# EAGLE board USB-C-Breakout-Panel (EAGLE 9.2.1), part 1 of 5
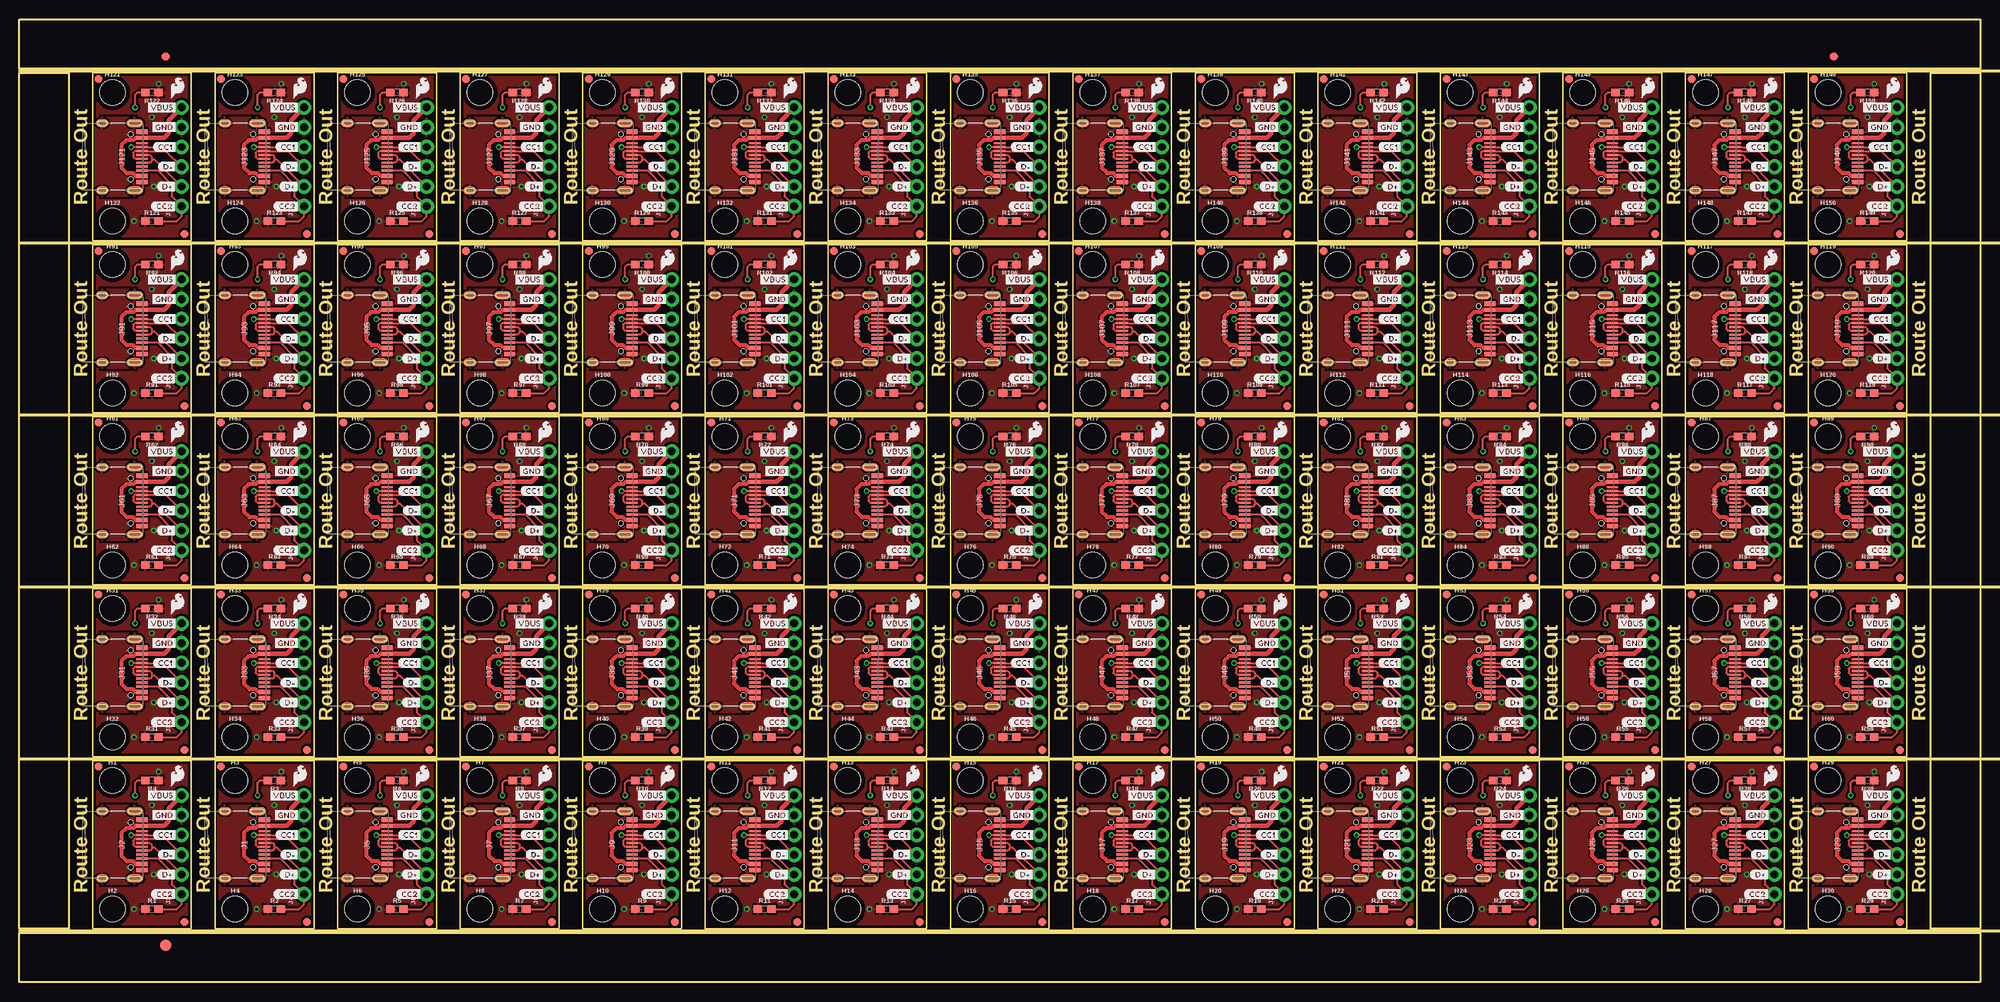
[diagram p0: board, top side]
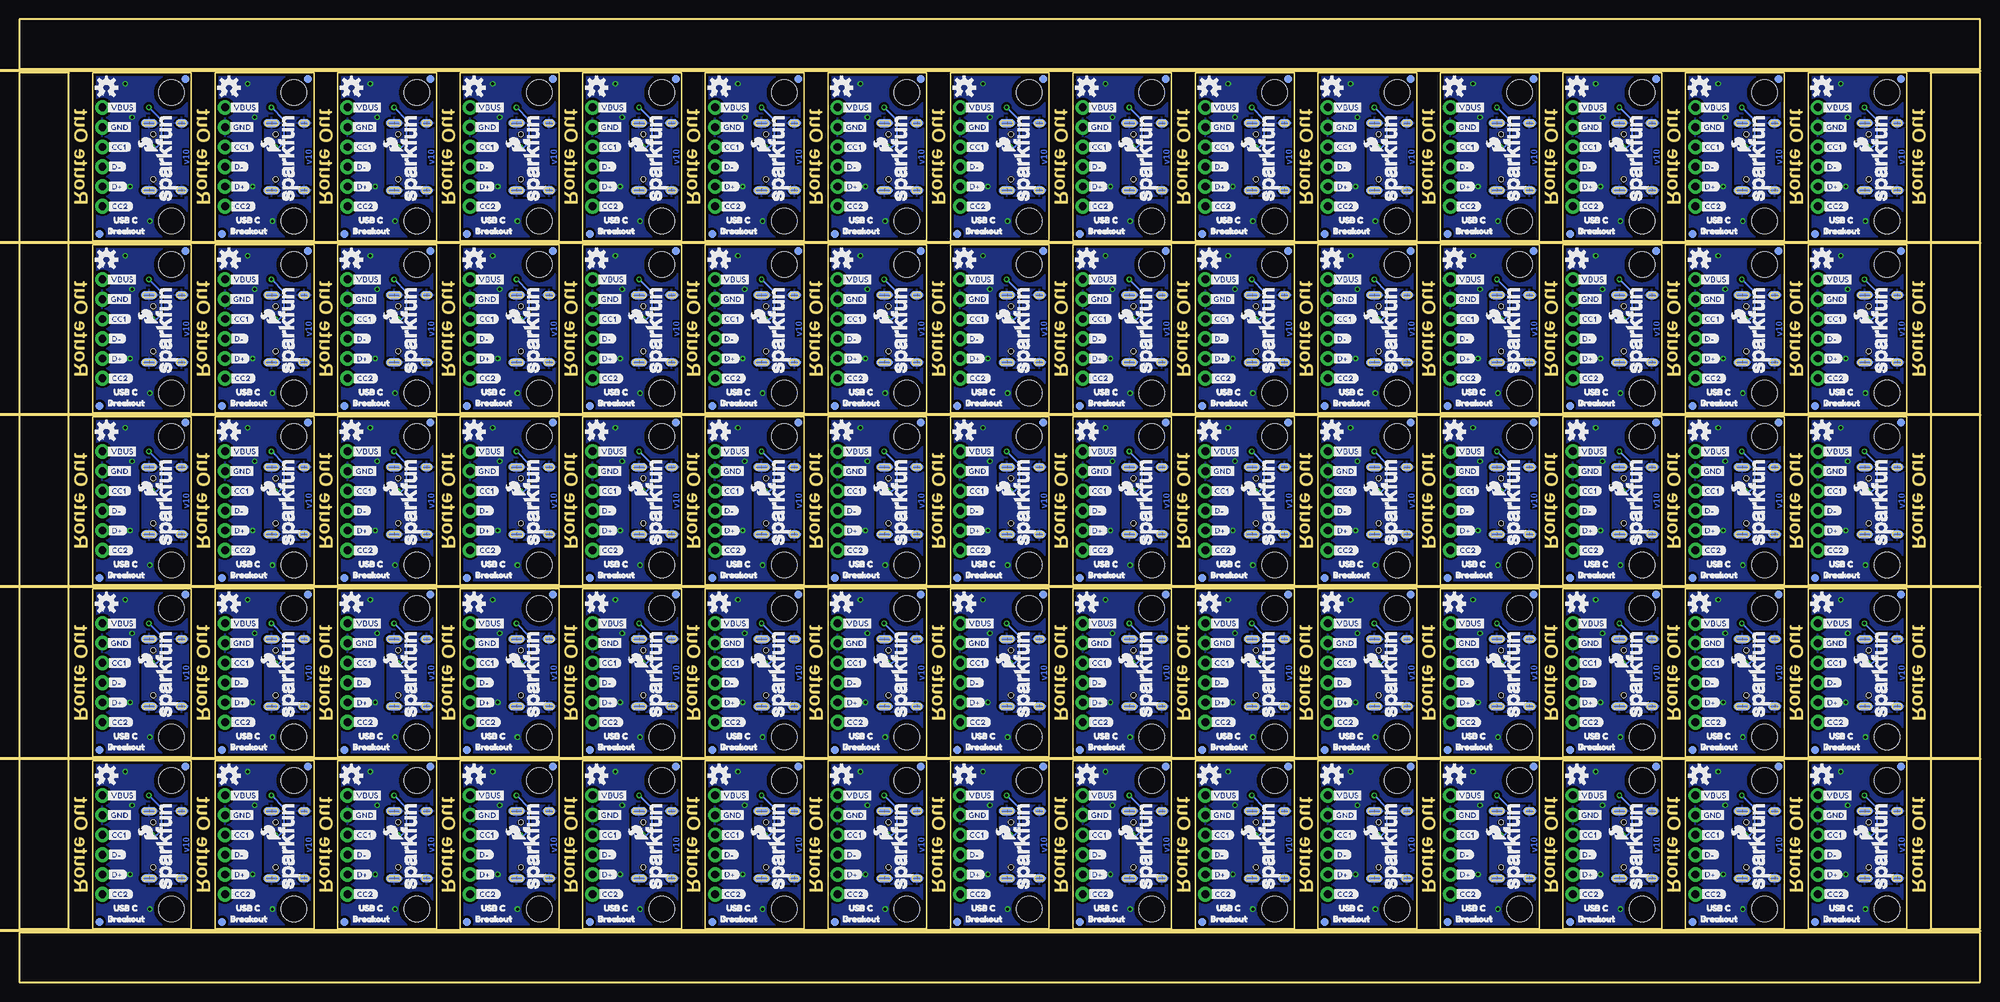
[diagram p1: board, bottom side, seen from below]

Size 251.97 x 123.7 mm. Coordinates in mm from the lower left corner, seen from the top.
Outline: 316 segments
Copper layers (1*16): Top 0.035mm / dielectric 1.5mm / Bottom 0.035mm
Design rules "SparkFun-2-layer-PCBWay-LIMIT": minimum track width 6mil, minimum drill 0.3mm, track to track 6mil, track to pad 6mil, pad to pad 6mil, via to via 6mil, smd to smd 6mil, copper to edge 6mil, drill to drill 6mil, minimum pad ring 6mil, minimum via ring 6mil, stop-mask expansion 4mil, vias tented up to drill 25mil, thermal gap 10mil
Net classes: 1 power: width 0.178 mm
Milling: 6 lines

## Footprints (pad centres in the part's own frame; a part is rotated, then mirrored left to right if it is on the bottom)
FIDUCIAL-1X2 = smd 1 x 1: 1 0,0
FIDUCIAL-1.5X3 = smd 1.5 x 1.5: 1 0,0
STAND-OFF = hole 3.302: 0,0
USB-C-16P = smd 0.3 x 1.45: A5 -1.25,0; A6 -0.25,0; A7 0.25,0; A8 1.25,0; B5 1.75,0; B6 0.75,0; B7 -0.75,0; B8 -1.75,0 | smd 0.6 x 1.45: GND -3.225,0; GND2 3.225,0 | smd 1 x 2.1: SHLD1 -4.32,-0.915; SHLD2 4.32,-0.915 | smd 1 x 2.1 bottom: SHLD3 -4.32,-0.915; SHLD4 4.32,-0.915 | smd 1 x 1.6: SHLD5 -4.32,-5.095; SHLD8 4.32,-5.095 | smd 1 x 1.6 bottom: SHLD6 -4.32,-5.095; SHLD7 4.32,-5.095 | smd 0.55 x 1.45: VBUS1 -2.45,0; VBUS2 2.45,0 | hole 0.65: -2.89,-1.445; 2.89,-1.445
1X06_NO_SILK = drill 1.016 pad 1.88: 1 0,0; 2 2.54,0; 3 5.08,0; 4 7.62,0; 5 10.16,0; 6 12.7,0
0603 = smd 1.1 x 1: 1 -0.85,0; 2 0.85,0

## Placement (x,y rotation side)
E$1  [FIDUCIAL-1X2]  18.8,118.94 0 top
E$2  [FIDUCIAL-1X2]  233.17,118.94 0 top
E$3  [FIDUCIAL-1.5X3]  18.8,4.76 0 top
H1  STAND-OFF  [STAND-OFF]  11.94,25.91 0 top
H2  STAND-OFF  [STAND-OFF]  11.94,9.4 0 top
H3  STAND-OFF  [STAND-OFF]  27.69,25.91 0 top
H4  STAND-OFF  [STAND-OFF]  27.69,9.4 0 top
H5  STAND-OFF  [STAND-OFF]  43.43,25.91 0 top
H6  STAND-OFF  [STAND-OFF]  43.43,9.4 0 top
H7  STAND-OFF  [STAND-OFF]  59.18,25.91 0 top
H8  STAND-OFF  [STAND-OFF]  59.18,9.4 0 top
H9  STAND-OFF  [STAND-OFF]  74.93,25.91 0 top
H10  STAND-OFF  [STAND-OFF]  74.93,9.4 0 top
H11  STAND-OFF  [STAND-OFF]  90.68,25.91 0 top
H12  STAND-OFF  [STAND-OFF]  90.68,9.4 0 top
H13  STAND-OFF  [STAND-OFF]  106.43,25.91 0 top
H14  STAND-OFF  [STAND-OFF]  106.43,9.4 0 top
H15  STAND-OFF  [STAND-OFF]  122.17,25.91 0 top
H16  STAND-OFF  [STAND-OFF]  122.17,9.4 0 top
H17  STAND-OFF  [STAND-OFF]  137.92,25.91 0 top
H18  STAND-OFF  [STAND-OFF]  137.92,9.4 0 top
H19  STAND-OFF  [STAND-OFF]  153.67,25.91 0 top
H20  STAND-OFF  [STAND-OFF]  153.67,9.4 0 top
H21  STAND-OFF  [STAND-OFF]  169.42,25.91 0 top
H22  STAND-OFF  [STAND-OFF]  169.42,9.4 0 top
H23  STAND-OFF  [STAND-OFF]  185.17,25.91 0 top
H24  STAND-OFF  [STAND-OFF]  185.17,9.4 0 top
H25  STAND-OFF  [STAND-OFF]  200.91,25.91 0 top
H26  STAND-OFF  [STAND-OFF]  200.91,9.4 0 top
H27  STAND-OFF  [STAND-OFF]  216.66,25.91 0 top
H28  STAND-OFF  [STAND-OFF]  216.66,9.4 0 top
H29  STAND-OFF  [STAND-OFF]  232.41,25.91 0 top
H30  STAND-OFF  [STAND-OFF]  232.41,9.4 0 top
H31  STAND-OFF  [STAND-OFF]  11.94,48.01 0 top
H32  STAND-OFF  [STAND-OFF]  11.94,31.5 0 top
H33  STAND-OFF  [STAND-OFF]  27.69,48.01 0 top
H34  STAND-OFF  [STAND-OFF]  27.69,31.5 0 top
H35  STAND-OFF  [STAND-OFF]  43.43,48.01 0 top
H36  STAND-OFF  [STAND-OFF]  43.43,31.5 0 top
H37  STAND-OFF  [STAND-OFF]  59.18,48.01 0 top
H38  STAND-OFF  [STAND-OFF]  59.18,31.5 0 top
H39  STAND-OFF  [STAND-OFF]  74.93,48.01 0 top
H40  STAND-OFF  [STAND-OFF]  74.93,31.5 0 top
H41  STAND-OFF  [STAND-OFF]  90.68,48.01 0 top
H42  STAND-OFF  [STAND-OFF]  90.68,31.5 0 top
H43  STAND-OFF  [STAND-OFF]  106.43,48.01 0 top
H44  STAND-OFF  [STAND-OFF]  106.43,31.5 0 top
H45  STAND-OFF  [STAND-OFF]  122.17,48.01 0 top
H46  STAND-OFF  [STAND-OFF]  122.17,31.5 0 top
H47  STAND-OFF  [STAND-OFF]  137.92,48.01 0 top
H48  STAND-OFF  [STAND-OFF]  137.92,31.5 0 top
H49  STAND-OFF  [STAND-OFF]  153.67,48.01 0 top
H50  STAND-OFF  [STAND-OFF]  153.67,31.5 0 top
H51  STAND-OFF  [STAND-OFF]  169.42,48.01 0 top
H52  STAND-OFF  [STAND-OFF]  169.42,31.5 0 top
H53  STAND-OFF  [STAND-OFF]  185.17,48.01 0 top
H54  STAND-OFF  [STAND-OFF]  185.17,31.5 0 top
H55  STAND-OFF  [STAND-OFF]  200.91,48.01 0 top
H56  STAND-OFF  [STAND-OFF]  200.91,31.5 0 top
H57  STAND-OFF  [STAND-OFF]  216.66,48.01 0 top
H58  STAND-OFF  [STAND-OFF]  216.66,31.5 0 top
H59  STAND-OFF  [STAND-OFF]  232.41,48.01 0 top
H60  STAND-OFF  [STAND-OFF]  232.41,31.5 0 top
H61  STAND-OFF  [STAND-OFF]  11.94,70.1 0 top
H62  STAND-OFF  [STAND-OFF]  11.94,53.59 0 top
H63  STAND-OFF  [STAND-OFF]  27.69,70.1 0 top
H64  STAND-OFF  [STAND-OFF]  27.69,53.59 0 top
H65  STAND-OFF  [STAND-OFF]  43.43,70.1 0 top
H66  STAND-OFF  [STAND-OFF]  43.43,53.59 0 top
H67  STAND-OFF  [STAND-OFF]  59.18,70.1 0 top
H68  STAND-OFF  [STAND-OFF]  59.18,53.59 0 top
H69  STAND-OFF  [STAND-OFF]  74.93,70.1 0 top
H70  STAND-OFF  [STAND-OFF]  74.93,53.59 0 top
H71  STAND-OFF  [STAND-OFF]  90.68,70.1 0 top
H72  STAND-OFF  [STAND-OFF]  90.68,53.59 0 top
H73  STAND-OFF  [STAND-OFF]  106.43,70.1 0 top
H74  STAND-OFF  [STAND-OFF]  106.43,53.59 0 top
H75  STAND-OFF  [STAND-OFF]  122.17,70.1 0 top
H76  STAND-OFF  [STAND-OFF]  122.17,53.59 0 top
H77  STAND-OFF  [STAND-OFF]  137.92,70.1 0 top
H78  STAND-OFF  [STAND-OFF]  137.92,53.59 0 top
H79  STAND-OFF  [STAND-OFF]  153.67,70.1 0 top
H80  STAND-OFF  [STAND-OFF]  153.67,53.59 0 top
H81  STAND-OFF  [STAND-OFF]  169.42,70.1 0 top
H82  STAND-OFF  [STAND-OFF]  169.42,53.59 0 top
H83  STAND-OFF  [STAND-OFF]  185.17,70.1 0 top
H84  STAND-OFF  [STAND-OFF]  185.17,53.59 0 top
H85  STAND-OFF  [STAND-OFF]  200.91,70.1 0 top
H86  STAND-OFF  [STAND-OFF]  200.91,53.59 0 top
H87  STAND-OFF  [STAND-OFF]  216.66,70.1 0 top
H88  STAND-OFF  [STAND-OFF]  216.66,53.59 0 top
H89  STAND-OFF  [STAND-OFF]  232.41,70.1 0 top
H90  STAND-OFF  [STAND-OFF]  232.41,53.59 0 top
H91  STAND-OFF  [STAND-OFF]  11.94,92.2 0 top
H92  STAND-OFF  [STAND-OFF]  11.94,75.69 0 top
H93  STAND-OFF  [STAND-OFF]  27.69,92.2 0 top
H94  STAND-OFF  [STAND-OFF]  27.69,75.69 0 top
H95  STAND-OFF  [STAND-OFF]  43.43,92.2 0 top
H96  STAND-OFF  [STAND-OFF]  43.43,75.69 0 top
H97  STAND-OFF  [STAND-OFF]  59.18,92.2 0 top
H98  STAND-OFF  [STAND-OFF]  59.18,75.69 0 top
H99  STAND-OFF  [STAND-OFF]  74.93,92.2 0 top
H100  STAND-OFF  [STAND-OFF]  74.93,75.69 0 top
H101  STAND-OFF  [STAND-OFF]  90.68,92.2 0 top
H102  STAND-OFF  [STAND-OFF]  90.68,75.69 0 top
H103  STAND-OFF  [STAND-OFF]  106.43,92.2 0 top
H104  STAND-OFF  [STAND-OFF]  106.43,75.69 0 top
H105  STAND-OFF  [STAND-OFF]  122.17,92.2 0 top
H106  STAND-OFF  [STAND-OFF]  122.17,75.69 0 top
H107  STAND-OFF  [STAND-OFF]  137.92,92.2 0 top
H108  STAND-OFF  [STAND-OFF]  137.92,75.69 0 top
H109  STAND-OFF  [STAND-OFF]  153.67,92.2 0 top
H110  STAND-OFF  [STAND-OFF]  153.67,75.69 0 top
H111  STAND-OFF  [STAND-OFF]  169.42,92.2 0 top
H112  STAND-OFF  [STAND-OFF]  169.42,75.69 0 top
H113  STAND-OFF  [STAND-OFF]  185.17,92.2 0 top
H114  STAND-OFF  [STAND-OFF]  185.17,75.69 0 top
H115  STAND-OFF  [STAND-OFF]  200.91,92.2 0 top
H116  STAND-OFF  [STAND-OFF]  200.91,75.69 0 top
H117  STAND-OFF  [STAND-OFF]  216.66,92.2 0 top
H118  STAND-OFF  [STAND-OFF]  216.66,75.69 0 top
H119  STAND-OFF  [STAND-OFF]  232.41,92.2 0 top
H120  STAND-OFF  [STAND-OFF]  232.41,75.69 0 top
H121  STAND-OFF  [STAND-OFF]  11.94,114.3 0 top
H122  STAND-OFF  [STAND-OFF]  11.94,97.79 0 top
H123  STAND-OFF  [STAND-OFF]  27.69,114.3 0 top
H124  STAND-OFF  [STAND-OFF]  27.69,97.79 0 top
H125  STAND-OFF  [STAND-OFF]  43.43,114.3 0 top
H126  STAND-OFF  [STAND-OFF]  43.43,97.79 0 top
H127  STAND-OFF  [STAND-OFF]  59.18,114.3 0 top
H128  STAND-OFF  [STAND-OFF]  59.18,97.79 0 top
H129  STAND-OFF  [STAND-OFF]  74.93,114.3 0 top
H130  STAND-OFF  [STAND-OFF]  74.93,97.79 0 top
H131  STAND-OFF  [STAND-OFF]  90.68,114.3 0 top
H132  STAND-OFF  [STAND-OFF]  90.68,97.79 0 top
H133  STAND-OFF  [STAND-OFF]  106.43,114.3 0 top
H134  STAND-OFF  [STAND-OFF]  106.43,97.79 0 top
H135  STAND-OFF  [STAND-OFF]  122.17,114.3 0 top
H136  STAND-OFF  [STAND-OFF]  122.17,97.79 0 top
H137  STAND-OFF  [STAND-OFF]  137.92,114.3 0 top
H138  STAND-OFF  [STAND-OFF]  137.92,97.79 0 top
H139  STAND-OFF  [STAND-OFF]  153.67,114.3 0 top
H140  STAND-OFF  [STAND-OFF]  153.67,97.79 0 top
H141  STAND-OFF  [STAND-OFF]  169.42,114.3 0 top
H142  STAND-OFF  [STAND-OFF]  169.42,97.79 0 top
H143  STAND-OFF  [STAND-OFF]  185.17,114.3 0 top
H144  STAND-OFF  [STAND-OFF]  185.17,97.79 0 top
H145  STAND-OFF  [STAND-OFF]  200.91,114.3 0 top
H146  STAND-OFF  [STAND-OFF]  200.91,97.79 0 top
H147  STAND-OFF  [STAND-OFF]  216.66,114.3 0 top
H148  STAND-OFF  [STAND-OFF]  216.66,97.79 0 top
H149  STAND-OFF  [STAND-OFF]  232.41,114.3 0 top
H150  STAND-OFF  [STAND-OFF]  232.41,97.79 0 top
J1  [USB-C-16P]  31.5,17.65 270 top
J2  [USB-C-16P]  15.75,17.65 270 top
J3  [1X06_NO_SILK]  20.83,11.3 90 top
J4  [1X06_NO_SILK]  36.58,11.3 90 top
J5  [USB-C-16P]  47.24,17.65 270 top
J6  [1X06_NO_SILK]  52.32,11.3 90 top
J7  [USB-C-16P]  62.99,17.65 270 top
J8  [1X06_NO_SILK]  68.07,11.3 90 top
J9  [USB-C-16P]  78.74,17.65 270 top
J10  [1X06_NO_SILK]  83.82,11.3 90 top
J11  [USB-C-16P]  94.49,17.65 270 top
J12  [1X06_NO_SILK]  99.57,11.3 90 top
J13  [USB-C-16P]  110.24,17.65 270 top
J14  [1X06_NO_SILK]  115.32,11.3 90 top
J15  [USB-C-16P]  125.98,17.65 270 top
J16  [1X06_NO_SILK]  131.06,11.3 90 top
J17  [USB-C-16P]  141.73,17.65 270 top
J18  [1X06_NO_SILK]  146.81,11.3 90 top
J19  [USB-C-16P]  157.48,17.65 270 top
J20  [1X06_NO_SILK]  162.56,11.3 90 top
J21  [USB-C-16P]  173.23,17.65 270 top
J22  [1X06_NO_SILK]  178.31,11.3 90 top
J23  [USB-C-16P]  188.98,17.65 270 top
J24  [1X06_NO_SILK]  194.06,11.3 90 top
J25  [USB-C-16P]  204.72,17.65 270 top
J26  [1X06_NO_SILK]  209.8,11.3 90 top
J27  [USB-C-16P]  220.47,17.65 270 top
J28  [1X06_NO_SILK]  225.55,11.3 90 top
J29  [USB-C-16P]  236.22,17.65 270 top
J30  [1X06_NO_SILK]  241.3,11.3 90 top
J31  [USB-C-16P]  15.75,39.75 270 top
J32  [1X06_NO_SILK]  20.83,33.4 90 top
J33  [USB-C-16P]  31.5,39.75 270 top
J34  [1X06_NO_SILK]  36.58,33.4 90 top
J35  [USB-C-16P]  47.24,39.75 270 top
J36  [1X06_NO_SILK]  52.32,33.4 90 top
J37  [USB-C-16P]  62.99,39.75 270 top
J38  [1X06_NO_SILK]  68.07,33.4 90 top
J39  [USB-C-16P]  78.74,39.75 270 top
J40  [1X06_NO_SILK]  83.82,33.4 90 top
J41  [USB-C-16P]  94.49,39.75 270 top
J42  [1X06_NO_SILK]  99.57,33.4 90 top
J43  [USB-C-16P]  110.24,39.75 270 top
J44  [1X06_NO_SILK]  115.32,33.4 90 top
J45  [USB-C-16P]  125.98,39.75 270 top
J46  [1X06_NO_SILK]  131.06,33.4 90 top
J47  [USB-C-16P]  141.73,39.75 270 top
J48  [1X06_NO_SILK]  146.81,33.4 90 top
J49  [USB-C-16P]  157.48,39.75 270 top
J50  [1X06_NO_SILK]  162.56,33.4 90 top
J51  [USB-C-16P]  173.23,39.75 270 top
J52  [1X06_NO_SILK]  178.31,33.4 90 top
J53  [USB-C-16P]  188.98,39.75 270 top
J54  [1X06_NO_SILK]  194.06,33.4 90 top
J55  [USB-C-16P]  204.72,39.75 270 top
J56  [1X06_NO_SILK]  209.8,33.4 90 top
J57  [USB-C-16P]  220.47,39.75 270 top
J58  [1X06_NO_SILK]  225.55,33.4 90 top
J59  [USB-C-16P]  236.22,39.75 270 top
J60  [1X06_NO_SILK]  241.3,33.4 90 top
J61  [USB-C-16P]  15.75,61.85 270 top
J62  [1X06_NO_SILK]  20.83,55.5 90 top
J63  [USB-C-16P]  31.5,61.85 270 top
J64  [1X06_NO_SILK]  36.58,55.5 90 top
J65  [USB-C-16P]  47.24,61.85 270 top
J66  [1X06_NO_SILK]  52.32,55.5 90 top
J67  [USB-C-16P]  62.99,61.85 270 top
J68  [1X06_NO_SILK]  68.07,55.5 90 top
J69  [USB-C-16P]  78.74,61.85 270 top
J70  [1X06_NO_SILK]  83.82,55.5 90 top
J71  [USB-C-16P]  94.49,61.85 270 top
J72  [1X06_NO_SILK]  99.57,55.5 90 top
J73  [USB-C-16P]  110.24,61.85 270 top
J74  [1X06_NO_SILK]  115.32,55.5 90 top
J75  [USB-C-16P]  125.98,61.85 270 top
J76  [1X06_NO_SILK]  131.06,55.5 90 top
J77  [USB-C-16P]  141.73,61.85 270 top
J78  [1X06_NO_SILK]  146.81,55.5 90 top
J79  [USB-C-16P]  157.48,61.85 270 top
J80  [1X06_NO_SILK]  162.56,55.5 90 top
J81  [USB-C-16P]  173.23,61.85 270 top
J82  [1X06_NO_SILK]  178.31,55.5 90 top
J83  [USB-C-16P]  188.98,61.85 270 top
J84  [1X06_NO_SILK]  194.06,55.5 90 top
J85  [USB-C-16P]  204.72,61.85 270 top
J86  [1X06_NO_SILK]  209.8,55.5 90 top
J87  [USB-C-16P]  220.47,61.85 270 top
J88  [1X06_NO_SILK]  225.55,55.5 90 top
J89  [USB-C-16P]  236.22,61.85 270 top
J90  [1X06_NO_SILK]  241.3,55.5 90 top
J91  [USB-C-16P]  15.75,83.95 270 top
J92  [1X06_NO_SILK]  20.83,77.6 90 top
J93  [USB-C-16P]  31.5,83.95 270 top
J94  [1X06_NO_SILK]  36.58,77.6 90 top
J95  [USB-C-16P]  47.24,83.95 270 top
J96  [1X06_NO_SILK]  52.32,77.6 90 top
J97  [USB-C-16P]  62.99,83.95 270 top
J98  [1X06_NO_SILK]  68.07,77.6 90 top
J99  [USB-C-16P]  78.74,83.95 270 top
J100  [1X06_NO_SILK]  83.82,77.6 90 top
J101  [USB-C-16P]  94.49,83.95 270 top
J102  [1X06_NO_SILK]  99.57,77.6 90 top
J103  [USB-C-16P]  110.24,83.95 270 top
J104  [1X06_NO_SILK]  115.32,77.6 90 top
J105  [USB-C-16P]  125.98,83.95 270 top
J106  [1X06_NO_SILK]  131.06,77.6 90 top
J107  [USB-C-16P]  141.73,83.95 270 top
J108  [1X06_NO_SILK]  146.81,77.6 90 top
J109  [USB-C-16P]  157.48,83.95 270 top
J110  [1X06_NO_SILK]  162.56,77.6 90 top
J111  [USB-C-16P]  173.23,83.95 270 top
J112  [1X06_NO_SILK]  178.31,77.6 90 top
J113  [USB-C-16P]  188.98,83.95 270 top
J114  [1X06_NO_SILK]  194.06,77.6 90 top
J115  [USB-C-16P]  204.72,83.95 270 top
J116  [1X06_NO_SILK]  209.8,77.6 90 top
J117  [USB-C-16P]  220.47,83.95 270 top
J118  [1X06_NO_SILK]  225.55,77.6 90 top
J119  [USB-C-16P]  236.22,83.95 270 top
J120  [1X06_NO_SILK]  241.3,77.6 90 top
J121  [USB-C-16P]  15.75,106.05 270 top
J122  [1X06_NO_SILK]  20.83,99.7 90 top
J123  [USB-C-16P]  31.5,106.05 270 top
J124  [1X06_NO_SILK]  36.58,99.7 90 top
J125  [USB-C-16P]  47.24,106.05 270 top
J126  [1X06_NO_SILK]  52.32,99.7 90 top
J127  [USB-C-16P]  62.99,106.05 270 top
J128  [1X06_NO_SILK]  68.07,99.7 90 top
J129  [USB-C-16P]  78.74,106.05 270 top
J130  [1X06_NO_SILK]  83.82,99.7 90 top
J131  [USB-C-16P]  94.49,106.05 270 top
J132  [1X06_NO_SILK]  99.57,99.7 90 top
J133  [USB-C-16P]  110.24,106.05 270 top
J134  [1X06_NO_SILK]  115.32,99.7 90 top
J135  [USB-C-16P]  125.98,106.05 270 top
J136  [1X06_NO_SILK]  131.06,99.7 90 top
J137  [USB-C-16P]  141.73,106.05 270 top
J138  [1X06_NO_SILK]  146.81,99.7 90 top
J139  [USB-C-16P]  157.48,106.05 270 top
J140  [1X06_NO_SILK]  162.56,99.7 90 top
J141  [USB-C-16P]  173.23,106.05 270 top
J142  [1X06_NO_SILK]  178.31,99.7 90 top
J143  [USB-C-16P]  188.98,106.05 270 top
J144  [1X06_NO_SILK]  194.06,99.7 90 top
J145  [USB-C-16P]  204.72,106.05 270 top
J146  [1X06_NO_SILK]  209.8,99.7 90 top
J147  [USB-C-16P]  220.47,106.05 270 top
J148  [1X06_NO_SILK]  225.55,99.7 90 top
J149  [USB-C-16P]  236.22,106.05 270 top
J150  [1X06_NO_SILK]  241.3,99.7 90 top
JP1  FIDUCIAL1X2  [FIDUCIAL-1X2]  25.91,27.69 180 top
JP2  FIDUCIAL1X2  [FIDUCIAL-1X2]  36.96,7.75 180 top
JP3  FIDUCIAL1X2  [FIDUCIAL-1X2]  10.16,27.69 180 top
JP4  FIDUCIAL1X2  [FIDUCIAL-1X2]  21.21,7.75 180 top
JP5  FIDUCIAL1X2  [FIDUCIAL-1X2]  10.16,27.69 180 bottom
JP6  FIDUCIAL1X2  [FIDUCIAL-1X2]  21.21,7.75 180 bottom
JP7  FIDUCIAL1X2  [FIDUCIAL-1X2]  25.91,27.69 180 bottom
JP8  FIDUCIAL1X2  [FIDUCIAL-1X2]  36.96,7.75 180 bottom
JP9  FIDUCIAL1X2  [FIDUCIAL-1X2]  41.66,27.69 180 top
JP10  FIDUCIAL1X2  [FIDUCIAL-1X2]  52.7,7.75 180 top
JP11  FIDUCIAL1X2  [FIDUCIAL-1X2]  41.66,27.69 180 bottom
JP12  FIDUCIAL1X2  [FIDUCIAL-1X2]  52.7,7.75 180 bottom
JP13  FIDUCIAL1X2  [FIDUCIAL-1X2]  57.4,27.69 180 top
JP14  FIDUCIAL1X2  [FIDUCIAL-1X2]  68.45,7.75 180 top
JP15  FIDUCIAL1X2  [FIDUCIAL-1X2]  57.4,27.69 180 bottom
JP16  FIDUCIAL1X2  [FIDUCIAL-1X2]  68.45,7.75 180 bottom
JP17  FIDUCIAL1X2  [FIDUCIAL-1X2]  73.15,27.69 180 top
JP18  FIDUCIAL1X2  [FIDUCIAL-1X2]  84.2,7.75 180 top
JP19  FIDUCIAL1X2  [FIDUCIAL-1X2]  73.15,27.69 180 bottom
JP20  FIDUCIAL1X2  [FIDUCIAL-1X2]  84.2,7.75 180 bottom
JP21  FIDUCIAL1X2  [FIDUCIAL-1X2]  88.9,27.69 180 top
JP22  FIDUCIAL1X2  [FIDUCIAL-1X2]  99.95,7.75 180 top
JP23  FIDUCIAL1X2  [FIDUCIAL-1X2]  88.9,27.69 180 bottom
JP24  FIDUCIAL1X2  [FIDUCIAL-1X2]  99.95,7.75 180 bottom
JP25  FIDUCIAL1X2  [FIDUCIAL-1X2]  104.65,27.69 180 top
JP26  FIDUCIAL1X2  [FIDUCIAL-1X2]  115.7,7.75 180 top
JP27  FIDUCIAL1X2  [FIDUCIAL-1X2]  104.65,27.69 180 bottom
JP28  FIDUCIAL1X2  [FIDUCIAL-1X2]  115.7,7.75 180 bottom
JP29  FIDUCIAL1X2  [FIDUCIAL-1X2]  120.4,27.69 180 top
JP30  FIDUCIAL1X2  [FIDUCIAL-1X2]  131.44,7.75 180 top
JP31  FIDUCIAL1X2  [FIDUCIAL-1X2]  120.4,27.69 180 bottom
JP32  FIDUCIAL1X2  [FIDUCIAL-1X2]  131.44,7.75 180 bottom
JP33  FIDUCIAL1X2  [FIDUCIAL-1X2]  136.14,27.69 180 top
JP34  FIDUCIAL1X2  [FIDUCIAL-1X2]  147.19,7.75 180 top
JP35  FIDUCIAL1X2  [FIDUCIAL-1X2]  136.14,27.69 180 bottom
JP36  FIDUCIAL1X2  [FIDUCIAL-1X2]  147.19,7.75 180 bottom
JP37  FIDUCIAL1X2  [FIDUCIAL-1X2]  151.89,27.69 180 top
JP38  FIDUCIAL1X2  [FIDUCIAL-1X2]  162.94,7.75 180 top
JP39  FIDUCIAL1X2  [FIDUCIAL-1X2]  151.89,27.69 180 bottom
JP40  FIDUCIAL1X2  [FIDUCIAL-1X2]  162.94,7.75 180 bottom
JP41  FIDUCIAL1X2  [FIDUCIAL-1X2]  167.64,27.69 180 top
JP42  FIDUCIAL1X2  [FIDUCIAL-1X2]  178.69,7.75 180 top
JP43  FIDUCIAL1X2  [FIDUCIAL-1X2]  167.64,27.69 180 bottom
JP44  FIDUCIAL1X2  [FIDUCIAL-1X2]  178.69,7.75 180 bottom
JP45  FIDUCIAL1X2  [FIDUCIAL-1X2]  183.39,27.69 180 top
JP46  FIDUCIAL1X2  [FIDUCIAL-1X2]  194.44,7.75 180 top
JP47  FIDUCIAL1X2  [FIDUCIAL-1X2]  183.39,27.69 180 bottom
JP48  FIDUCIAL1X2  [FIDUCIAL-1X2]  194.44,7.75 180 bottom
JP49  FIDUCIAL1X2  [FIDUCIAL-1X2]  199.14,27.69 180 top
JP50  FIDUCIAL1X2  [FIDUCIAL-1X2]  210.19,7.75 180 top
JP51  FIDUCIAL1X2  [FIDUCIAL-1X2]  199.14,27.69 180 bottom
JP52  FIDUCIAL1X2  [FIDUCIAL-1X2]  210.19,7.75 180 bottom
JP53  FIDUCIAL1X2  [FIDUCIAL-1X2]  214.88,27.69 180 top
JP54  FIDUCIAL1X2  [FIDUCIAL-1X2]  225.93,7.75 180 top
JP55  FIDUCIAL1X2  [FIDUCIAL-1X2]  214.88,27.69 180 bottom
JP56  FIDUCIAL1X2  [FIDUCIAL-1X2]  225.93,7.75 180 bottom
JP57  FIDUCIAL1X2  [FIDUCIAL-1X2]  230.63,27.69 180 top
JP58  FIDUCIAL1X2  [FIDUCIAL-1X2]  241.68,7.75 180 top
JP59  FIDUCIAL1X2  [FIDUCIAL-1X2]  230.63,27.69 180 bottom
JP60  FIDUCIAL1X2  [FIDUCIAL-1X2]  241.68,7.75 180 bottom
JP61  FIDUCIAL1X2  [FIDUCIAL-1X2]  10.16,49.78 180 top
JP62  FIDUCIAL1X2  [FIDUCIAL-1X2]  21.21,29.84 180 top
JP63  FIDUCIAL1X2  [FIDUCIAL-1X2]  10.16,49.78 180 bottom
JP64  FIDUCIAL1X2  [FIDUCIAL-1X2]  21.21,29.84 180 bottom
JP65  FIDUCIAL1X2  [FIDUCIAL-1X2]  25.91,49.78 180 top
JP66  FIDUCIAL1X2  [FIDUCIAL-1X2]  36.96,29.84 180 top
JP67  FIDUCIAL1X2  [FIDUCIAL-1X2]  25.91,49.78 180 bottom
JP68  FIDUCIAL1X2  [FIDUCIAL-1X2]  36.96,29.84 180 bottom
JP69  FIDUCIAL1X2  [FIDUCIAL-1X2]  41.66,49.78 180 top
JP70  FIDUCIAL1X2  [FIDUCIAL-1X2]  52.7,29.84 180 top
JP71  FIDUCIAL1X2  [FIDUCIAL-1X2]  41.66,49.78 180 bottom
JP72  FIDUCIAL1X2  [FIDUCIAL-1X2]  52.7,29.84 180 bottom
JP73  FIDUCIAL1X2  [FIDUCIAL-1X2]  57.4,49.78 180 top
JP74  FIDUCIAL1X2  [FIDUCIAL-1X2]  68.45,29.84 180 top
JP75  FIDUCIAL1X2  [FIDUCIAL-1X2]  57.4,49.78 180 bottom
JP76  FIDUCIAL1X2  [FIDUCIAL-1X2]  68.45,29.84 180 bottom
JP77  FIDUCIAL1X2  [FIDUCIAL-1X2]  73.15,49.78 180 top
JP78  FIDUCIAL1X2  [FIDUCIAL-1X2]  84.2,29.84 180 top
JP79  FIDUCIAL1X2  [FIDUCIAL-1X2]  73.15,49.78 180 bottom
JP80  FIDUCIAL1X2  [FIDUCIAL-1X2]  84.2,29.84 180 bottom
JP81  FIDUCIAL1X2  [FIDUCIAL-1X2]  88.9,49.78 180 top
JP82  FIDUCIAL1X2  [FIDUCIAL-1X2]  99.95,29.84 180 top
JP83  FIDUCIAL1X2  [FIDUCIAL-1X2]  88.9,49.78 180 bottom
JP84  FIDUCIAL1X2  [FIDUCIAL-1X2]  99.95,29.84 180 bottom
JP85  FIDUCIAL1X2  [FIDUCIAL-1X2]  104.65,49.78 180 top
JP86  FIDUCIAL1X2  [FIDUCIAL-1X2]  115.7,29.84 180 top
JP87  FIDUCIAL1X2  [FIDUCIAL-1X2]  104.65,49.78 180 bottom
JP88  FIDUCIAL1X2  [FIDUCIAL-1X2]  115.7,29.84 180 bottom
JP89  FIDUCIAL1X2  [FIDUCIAL-1X2]  120.4,49.78 180 top
JP90  FIDUCIAL1X2  [FIDUCIAL-1X2]  131.44,29.84 180 top
JP91  FIDUCIAL1X2  [FIDUCIAL-1X2]  120.4,49.78 180 bottom
JP92  FIDUCIAL1X2  [FIDUCIAL-1X2]  131.44,29.84 180 bottom
JP93  FIDUCIAL1X2  [FIDUCIAL-1X2]  136.14,49.78 180 top
JP94  FIDUCIAL1X2  [FIDUCIAL-1X2]  147.19,29.84 180 top
JP95  FIDUCIAL1X2  [FIDUCIAL-1X2]  136.14,49.78 180 bottom
JP96  FIDUCIAL1X2  [FIDUCIAL-1X2]  147.19,29.84 180 bottom
JP97  FIDUCIAL1X2  [FIDUCIAL-1X2]  151.89,49.78 180 top
JP98  FIDUCIAL1X2  [FIDUCIAL-1X2]  162.94,29.84 180 top
JP99  FIDUCIAL1X2  [FIDUCIAL-1X2]  151.89,49.78 180 bottom
JP100  FIDUCIAL1X2  [FIDUCIAL-1X2]  162.94,29.84 180 bottom
JP101  FIDUCIAL1X2  [FIDUCIAL-1X2]  167.64,49.78 180 top
JP102  FIDUCIAL1X2  [FIDUCIAL-1X2]  178.69,29.84 180 top
JP103  FIDUCIAL1X2  [FIDUCIAL-1X2]  167.64,49.78 180 bottom
JP104  FIDUCIAL1X2  [FIDUCIAL-1X2]  178.69,29.84 180 bottom
JP105  FIDUCIAL1X2  [FIDUCIAL-1X2]  183.39,49.78 180 top
JP106  FIDUCIAL1X2  [FIDUCIAL-1X2]  194.44,29.84 180 top
JP107  FIDUCIAL1X2  [FIDUCIAL-1X2]  183.39,49.78 180 bottom
JP108  FIDUCIAL1X2  [FIDUCIAL-1X2]  194.44,29.84 180 bottom
JP109  FIDUCIAL1X2  [FIDUCIAL-1X2]  199.14,49.78 180 top
JP110  FIDUCIAL1X2  [FIDUCIAL-1X2]  210.19,29.84 180 top
JP111  FIDUCIAL1X2  [FIDUCIAL-1X2]  199.14,49.78 180 bottom
JP112  FIDUCIAL1X2  [FIDUCIAL-1X2]  210.19,29.84 180 bottom
JP113  FIDUCIAL1X2  [FIDUCIAL-1X2]  214.88,49.78 180 top
JP114  FIDUCIAL1X2  [FIDUCIAL-1X2]  225.93,29.84 180 top
JP115  FIDUCIAL1X2  [FIDUCIAL-1X2]  214.88,49.78 180 bottom
JP116  FIDUCIAL1X2  [FIDUCIAL-1X2]  225.93,29.84 180 bottom
JP117  FIDUCIAL1X2  [FIDUCIAL-1X2]  230.63,49.78 180 top
JP118  FIDUCIAL1X2  [FIDUCIAL-1X2]  241.68,29.84 180 top
JP119  FIDUCIAL1X2  [FIDUCIAL-1X2]  230.63,49.78 180 bottom
JP120  FIDUCIAL1X2  [FIDUCIAL-1X2]  241.68,29.84 180 bottom
JP121  FIDUCIAL1X2  [FIDUCIAL-1X2]  10.16,71.88 180 top
JP122  FIDUCIAL1X2  [FIDUCIAL-1X2]  21.21,51.94 180 top
JP123  FIDUCIAL1X2  [FIDUCIAL-1X2]  10.16,71.88 180 bottom
JP124  FIDUCIAL1X2  [FIDUCIAL-1X2]  21.21,51.94 180 bottom
JP125  FIDUCIAL1X2  [FIDUCIAL-1X2]  25.91,71.88 180 top
JP126  FIDUCIAL1X2  [FIDUCIAL-1X2]  36.96,51.94 180 top
JP127  FIDUCIAL1X2  [FIDUCIAL-1X2]  25.91,71.88 180 bottom
JP128  FIDUCIAL1X2  [FIDUCIAL-1X2]  36.96,51.94 180 bottom
JP129  FIDUCIAL1X2  [FIDUCIAL-1X2]  41.66,71.88 180 top
JP130  FIDUCIAL1X2  [FIDUCIAL-1X2]  52.7,51.94 180 top
JP131  FIDUCIAL1X2  [FIDUCIAL-1X2]  41.66,71.88 180 bottom
JP132  FIDUCIAL1X2  [FIDUCIAL-1X2]  52.7,51.94 180 bottom
JP133  FIDUCIAL1X2  [FIDUCIAL-1X2]  57.4,71.88 180 top
JP134  FIDUCIAL1X2  [FIDUCIAL-1X2]  68.45,51.94 180 top
JP135  FIDUCIAL1X2  [FIDUCIAL-1X2]  57.4,71.88 180 bottom
JP136  FIDUCIAL1X2  [FIDUCIAL-1X2]  68.45,51.94 180 bottom
JP137  FIDUCIAL1X2  [FIDUCIAL-1X2]  73.15,71.88 180 top
JP138  FIDUCIAL1X2  [FIDUCIAL-1X2]  84.2,51.94 180 top
JP139  FIDUCIAL1X2  [FIDUCIAL-1X2]  73.15,71.88 180 bottom
JP140  FIDUCIAL1X2  [FIDUCIAL-1X2]  84.2,51.94 180 bottom
JP141  FIDUCIAL1X2  [FIDUCIAL-1X2]  88.9,71.88 180 top
JP142  FIDUCIAL1X2  [FIDUCIAL-1X2]  99.95,51.94 180 top
JP143  FIDUCIAL1X2  [FIDUCIAL-1X2]  88.9,71.88 180 bottom
JP144  FIDUCIAL1X2  [FIDUCIAL-1X2]  99.95,51.94 180 bottom
JP145  FIDUCIAL1X2  [FIDUCIAL-1X2]  104.65,71.88 180 top
JP146  FIDUCIAL1X2  [FIDUCIAL-1X2]  115.7,51.94 180 top
JP147  FIDUCIAL1X2  [FIDUCIAL-1X2]  104.65,71.88 180 bottom
JP148  FIDUCIAL1X2  [FIDUCIAL-1X2]  115.7,51.94 180 bottom
JP149  FIDUCIAL1X2  [FIDUCIAL-1X2]  120.4,71.88 180 top
JP150  FIDUCIAL1X2  [FIDUCIAL-1X2]  131.44,51.94 180 top
JP151  FIDUCIAL1X2  [FIDUCIAL-1X2]  120.4,71.88 180 bottom
JP152  FIDUCIAL1X2  [FIDUCIAL-1X2]  131.44,51.94 180 bottom
JP153  FIDUCIAL1X2  [FIDUCIAL-1X2]  136.14,71.88 180 top
JP154  FIDUCIAL1X2  [FIDUCIAL-1X2]  147.19,51.94 180 top
JP155  FIDUCIAL1X2  [FIDUCIAL-1X2]  136.14,71.88 180 bottom
JP156  FIDUCIAL1X2  [FIDUCIAL-1X2]  147.19,51.94 180 bottom
JP157  FIDUCIAL1X2  [FIDUCIAL-1X2]  151.89,71.88 180 top
JP158  FIDUCIAL1X2  [FIDUCIAL-1X2]  162.94,51.94 180 top
JP159  FIDUCIAL1X2  [FIDUCIAL-1X2]  151.89,71.88 180 bottom
JP160  FIDUCIAL1X2  [FIDUCIAL-1X2]  162.94,51.94 180 bottom
JP161  FIDUCIAL1X2  [FIDUCIAL-1X2]  167.64,71.88 180 top
JP162  FIDUCIAL1X2  [FIDUCIAL-1X2]  178.69,51.94 180 top
JP163  FIDUCIAL1X2  [FIDUCIAL-1X2]  167.64,71.88 180 bottom
JP164  FIDUCIAL1X2  [FIDUCIAL-1X2]  178.69,51.94 180 bottom
JP165  FIDUCIAL1X2  [FIDUCIAL-1X2]  183.39,71.88 180 top
JP166  FIDUCIAL1X2  [FIDUCIAL-1X2]  194.44,51.94 180 top
JP167  FIDUCIAL1X2  [FIDUCIAL-1X2]  183.39,71.88 180 bottom
JP168  FIDUCIAL1X2  [FIDUCIAL-1X2]  194.44,51.94 180 bottom
JP169  FIDUCIAL1X2  [FIDUCIAL-1X2]  199.14,71.88 180 top
JP170  FIDUCIAL1X2  [FIDUCIAL-1X2]  210.19,51.94 180 top
JP171  FIDUCIAL1X2  [FIDUCIAL-1X2]  199.14,71.88 180 bottom
JP172  FIDUCIAL1X2  [FIDUCIAL-1X2]  210.19,51.94 180 bottom
JP173  FIDUCIAL1X2  [FIDUCIAL-1X2]  214.88,71.88 180 top
JP174  FIDUCIAL1X2  [FIDUCIAL-1X2]  225.93,51.94 180 top
JP175  FIDUCIAL1X2  [FIDUCIAL-1X2]  214.88,71.88 180 bottom
JP176  FIDUCIAL1X2  [FIDUCIAL-1X2]  225.93,51.94 180 bottom
JP177  FIDUCIAL1X2  [FIDUCIAL-1X2]  230.63,71.88 180 top
JP178  FIDUCIAL1X2  [FIDUCIAL-1X2]  241.68,51.94 180 top
JP179  FIDUCIAL1X2  [FIDUCIAL-1X2]  230.63,71.88 180 bottom
JP180  FIDUCIAL1X2  [FIDUCIAL-1X2]  241.68,51.94 180 bottom
JP181  FIDUCIAL1X2  [FIDUCIAL-1X2]  10.16,93.98 180 top
JP182  FIDUCIAL1X2  [FIDUCIAL-1X2]  21.21,74.04 180 top
JP183  FIDUCIAL1X2  [FIDUCIAL-1X2]  10.16,93.98 180 bottom
JP184  FIDUCIAL1X2  [FIDUCIAL-1X2]  21.21,74.04 180 bottom
JP185  FIDUCIAL1X2  [FIDUCIAL-1X2]  25.91,93.98 180 top
JP186  FIDUCIAL1X2  [FIDUCIAL-1X2]  36.96,74.04 180 top
JP187  FIDUCIAL1X2  [FIDUCIAL-1X2]  25.91,93.98 180 bottom
JP188  FIDUCIAL1X2  [FIDUCIAL-1X2]  36.96,74.04 180 bottom
JP189  FIDUCIAL1X2  [FIDUCIAL-1X2]  41.66,93.98 180 top
JP190  FIDUCIAL1X2  [FIDUCIAL-1X2]  52.7,74.04 180 top
JP191  FIDUCIAL1X2  [FIDUCIAL-1X2]  41.66,93.98 180 bottom
JP192  FIDUCIAL1X2  [FIDUCIAL-1X2]  52.7,74.04 180 bottom
JP193  FIDUCIAL1X2  [FIDUCIAL-1X2]  57.4,93.98 180 top
JP194  FIDUCIAL1X2  [FIDUCIAL-1X2]  68.45,74.04 180 top
JP195  FIDUCIAL1X2  [FIDUCIAL-1X2]  57.4,93.98 180 bottom
JP196  FIDUCIAL1X2  [FIDUCIAL-1X2]  68.45,74.04 180 bottom
JP197  FIDUCIAL1X2  [FIDUCIAL-1X2]  73.15,93.98 180 top
JP198  FIDUCIAL1X2  [FIDUCIAL-1X2]  84.2,74.04 180 top
JP199  FIDUCIAL1X2  [FIDUCIAL-1X2]  73.15,93.98 180 bottom
JP200  FIDUCIAL1X2  [FIDUCIAL-1X2]  84.2,74.04 180 bottom
JP201  FIDUCIAL1X2  [FIDUCIAL-1X2]  88.9,93.98 180 top
JP202  FIDUCIAL1X2  [FIDUCIAL-1X2]  99.95,74.04 180 top
JP203  FIDUCIAL1X2  [FIDUCIAL-1X2]  88.9,93.98 180 bottom
JP204  FIDUCIAL1X2  [FIDUCIAL-1X2]  99.95,74.04 180 bottom
JP205  FIDUCIAL1X2  [FIDUCIAL-1X2]  104.65,93.98 180 top
JP206  FIDUCIAL1X2  [FIDUCIAL-1X2]  115.7,74.04 180 top
JP207  FIDUCIAL1X2  [FIDUCIAL-1X2]  104.65,93.98 180 bottom
JP208  FIDUCIAL1X2  [FIDUCIAL-1X2]  115.7,74.04 180 bottom
JP209  FIDUCIAL1X2  [FIDUCIAL-1X2]  120.4,93.98 180 top
JP210  FIDUCIAL1X2  [FIDUCIAL-1X2]  131.44,74.04 180 top
JP211  FIDUCIAL1X2  [FIDUCIAL-1X2]  120.4,93.98 180 bottom
JP212  FIDUCIAL1X2  [FIDUCIAL-1X2]  131.44,74.04 180 bottom
JP213  FIDUCIAL1X2  [FIDUCIAL-1X2]  136.14,93.98 180 top
JP214  FIDUCIAL1X2  [FIDUCIAL-1X2]  147.19,74.04 180 top
JP215  FIDUCIAL1X2  [FIDUCIAL-1X2]  136.14,93.98 180 bottom
JP216  FIDUCIAL1X2  [FIDUCIAL-1X2]  147.19,74.04 180 bottom
JP217  FIDUCIAL1X2  [FIDUCIAL-1X2]  151.89,93.98 180 top
JP218  FIDUCIAL1X2  [FIDUCIAL-1X2]  162.94,74.04 180 top
JP219  FIDUCIAL1X2  [FIDUCIAL-1X2]  151.89,93.98 180 bottom
JP220  FIDUCIAL1X2  [FIDUCIAL-1X2]  162.94,74.04 180 bottom
JP221  FIDUCIAL1X2  [FIDUCIAL-1X2]  167.64,93.98 180 top
JP222  FIDUCIAL1X2  [FIDUCIAL-1X2]  178.69,74.04 180 top
JP223  FIDUCIAL1X2  [FIDUCIAL-1X2]  167.64,93.98 180 bottom
JP224  FIDUCIAL1X2  [FIDUCIAL-1X2]  178.69,74.04 180 bottom
JP225  FIDUCIAL1X2  [FIDUCIAL-1X2]  183.39,93.98 180 top
JP226  FIDUCIAL1X2  [FIDUCIAL-1X2]  194.44,74.04 180 top
JP227  FIDUCIAL1X2  [FIDUCIAL-1X2]  183.39,93.98 180 bottom
JP228  FIDUCIAL1X2  [FIDUCIAL-1X2]  194.44,74.04 180 bottom
JP229  FIDUCIAL1X2  [FIDUCIAL-1X2]  199.14,93.98 180 top
JP230  FIDUCIAL1X2  [FIDUCIAL-1X2]  210.19,74.04 180 top
JP231  FIDUCIAL1X2  [FIDUCIAL-1X2]  199.14,93.98 180 bottom
JP232  FIDUCIAL1X2  [FIDUCIAL-1X2]  210.19,74.04 180 bottom
JP233  FIDUCIAL1X2  [FIDUCIAL-1X2]  214.88,93.98 180 top
JP234  FIDUCIAL1X2  [FIDUCIAL-1X2]  225.93,74.04 180 top
JP235  FIDUCIAL1X2  [FIDUCIAL-1X2]  214.88,93.98 180 bottom
JP236  FIDUCIAL1X2  [FIDUCIAL-1X2]  225.93,74.04 180 bottom
JP237  FIDUCIAL1X2  [FIDUCIAL-1X2]  230.63,93.98 180 top
JP238  FIDUCIAL1X2  [FIDUCIAL-1X2]  241.68,74.04 180 top
JP239  FIDUCIAL1X2  [FIDUCIAL-1X2]  230.63,93.98 180 bottom
JP240  FIDUCIAL1X2  [FIDUCIAL-1X2]  241.68,74.04 180 bottom
JP241  FIDUCIAL1X2  [FIDUCIAL-1X2]  10.16,116.08 180 top
JP242  FIDUCIAL1X2  [FIDUCIAL-1X2]  21.21,96.14 180 top
JP243  FIDUCIAL1X2  [FIDUCIAL-1X2]  10.16,116.08 180 bottom
JP244  FIDUCIAL1X2  [FIDUCIAL-1X2]  21.21,96.14 180 bottom
JP245  FIDUCIAL1X2  [FIDUCIAL-1X2]  25.91,116.08 180 top
JP246  FIDUCIAL1X2  [FIDUCIAL-1X2]  36.96,96.14 180 top
JP247  FIDUCIAL1X2  [FIDUCIAL-1X2]  25.91,116.08 180 bottom
JP248  FIDUCIAL1X2  [FIDUCIAL-1X2]  36.96,96.14 180 bottom
JP249  FIDUCIAL1X2  [FIDUCIAL-1X2]  41.66,116.08 180 top
JP250  FIDUCIAL1X2  [FIDUCIAL-1X2]  52.7,96.14 180 top
JP251  FIDUCIAL1X2  [FIDUCIAL-1X2]  41.66,116.08 180 bottom
JP252  FIDUCIAL1X2  [FIDUCIAL-1X2]  52.7,96.14 180 bottom
JP253  FIDUCIAL1X2  [FIDUCIAL-1X2]  57.4,116.08 180 top
JP254  FIDUCIAL1X2  [FIDUCIAL-1X2]  68.45,96.14 180 top
JP255  FIDUCIAL1X2  [FIDUCIAL-1X2]  57.4,116.08 180 bottom
JP256  FIDUCIAL1X2  [FIDUCIAL-1X2]  68.45,96.14 180 bottom
JP257  FIDUCIAL1X2  [FIDUCIAL-1X2]  73.15,116.08 180 top
JP258  FIDUCIAL1X2  [FIDUCIAL-1X2]  84.2,96.14 180 top
JP259  FIDUCIAL1X2  [FIDUCIAL-1X2]  73.15,116.08 180 bottom
JP260  FIDUCIAL1X2  [FIDUCIAL-1X2]  84.2,96.14 180 bottom
JP261  FIDUCIAL1X2  [FIDUCIAL-1X2]  88.9,116.08 180 top
JP262  FIDUCIAL1X2  [FIDUCIAL-1X2]  99.95,96.14 180 top
JP263  FIDUCIAL1X2  [FIDUCIAL-1X2]  88.9,116.08 180 bottom
JP264  FIDUCIAL1X2  [FIDUCIAL-1X2]  99.95,96.14 180 bottom
JP265  FIDUCIAL1X2  [FIDUCIAL-1X2]  104.65,116.08 180 top
JP266  FIDUCIAL1X2  [FIDUCIAL-1X2]  115.7,96.14 180 top
JP267  FIDUCIAL1X2  [FIDUCIAL-1X2]  104.65,116.08 180 bottom
JP268  FIDUCIAL1X2  [FIDUCIAL-1X2]  115.7,96.14 180 bottom
JP269  FIDUCIAL1X2  [FIDUCIAL-1X2]  120.4,116.08 180 top
JP270  FIDUCIAL1X2  [FIDUCIAL-1X2]  131.44,96.14 180 top
JP271  FIDUCIAL1X2  [FIDUCIAL-1X2]  120.4,116.08 180 bottom
JP272  FIDUCIAL1X2  [FIDUCIAL-1X2]  131.44,96.14 180 bottom
JP273  FIDUCIAL1X2  [FIDUCIAL-1X2]  136.14,116.08 180 top
JP274  FIDUCIAL1X2  [FIDUCIAL-1X2]  147.19,96.14 180 top
JP275  FIDUCIAL1X2  [FIDUCIAL-1X2]  136.14,116.08 180 bottom
JP276  FIDUCIAL1X2  [FIDUCIAL-1X2]  147.19,96.14 180 bottom
JP277  FIDUCIAL1X2  [FIDUCIAL-1X2]  151.89,116.08 180 top
JP278  FIDUCIAL1X2  [FIDUCIAL-1X2]  162.94,96.14 180 top
JP279  FIDUCIAL1X2  [FIDUCIAL-1X2]  151.89,116.08 180 bottom
JP280  FIDUCIAL1X2  [FIDUCIAL-1X2]  162.94,96.14 180 bottom
JP281  FIDUCIAL1X2  [FIDUCIAL-1X2]  167.64,116.08 180 top
JP282  FIDUCIAL1X2  [FIDUCIAL-1X2]  178.69,96.14 180 top
JP283  FIDUCIAL1X2  [FIDUCIAL-1X2]  167.64,116.08 180 bottom
JP284  FIDUCIAL1X2  [FIDUCIAL-1X2]  178.69,96.14 180 bottom
JP285  FIDUCIAL1X2  [FIDUCIAL-1X2]  183.39,116.08 180 top
JP286  FIDUCIAL1X2  [FIDUCIAL-1X2]  194.44,96.14 180 top
JP287  FIDUCIAL1X2  [FIDUCIAL-1X2]  183.39,116.08 180 bottom
JP288  FIDUCIAL1X2  [FIDUCIAL-1X2]  194.44,96.14 180 bottom
JP289  FIDUCIAL1X2  [FIDUCIAL-1X2]  199.14,116.08 180 top
JP290  FIDUCIAL1X2  [FIDUCIAL-1X2]  210.19,96.14 180 top
JP291  FIDUCIAL1X2  [FIDUCIAL-1X2]  199.14,116.08 180 bottom
JP292  FIDUCIAL1X2  [FIDUCIAL-1X2]  210.19,96.14 180 bottom
JP293  FIDUCIAL1X2  [FIDUCIAL-1X2]  214.88,116.08 180 top
JP294  FIDUCIAL1X2  [FIDUCIAL-1X2]  225.93,96.14 180 top
JP295  FIDUCIAL1X2  [FIDUCIAL-1X2]  214.88,116.08 180 bottom
JP296  FIDUCIAL1X2  [FIDUCIAL-1X2]  225.93,96.14 180 bottom
JP297  FIDUCIAL1X2  [FIDUCIAL-1X2]  230.63,116.08 180 top
JP298  FIDUCIAL1X2  [FIDUCIAL-1X2]  241.68,96.14 180 top
JP299  FIDUCIAL1X2  [FIDUCIAL-1X2]  230.63,116.08 180 bottom
JP300  FIDUCIAL1X2  [FIDUCIAL-1X2]  241.68,96.14 180 bottom
LOGO1  OSHW-LOGOS  [OSHW-LOGO-S]  20.32,26.54 0 bottom
LOGO2  SFE_LOGO_FLAME.1_INCH  [SFE_LOGO_FLAME_.1]  20.32,26.54 0 top
LOGO3  OSHW-LOGOS  [OSHW-LOGO-S]  36.07,26.54 0 bottom
LOGO4  SFE_LOGO_NAME_FLAME.1_INCH  [SFE_LOGO_NAME_FLAME_.1]  12.57,17.53 90 bottom
LOGO5  SFE_LOGO_FLAME.1_INCH  [SFE_LOGO_FLAME_.1]  36.07,26.54 0 top
LOGO6  SFE_LOGO_NAME_FLAME.1_INCH  [SFE_LOGO_NAME_FLAME_.1]  28.32,17.53 90 bottom
LOGO7  OSHW-LOGOS  [OSHW-LOGO-S]  51.82,26.54 0 bottom
LOGO8  SFE_LOGO_FLAME.1_INCH  [SFE_LOGO_FLAME_.1]  51.82,26.54 0 top
LOGO9  SFE_LOGO_NAME_FLAME.1_INCH  [SFE_LOGO_NAME_FLAME_.1]  44.07,17.53 90 bottom
LOGO10  OSHW-LOGOS  [OSHW-LOGO-S]  67.56,26.54 0 bottom
LOGO11  SFE_LOGO_FLAME.1_INCH  [SFE_LOGO_FLAME_.1]  67.56,26.54 0 top
LOGO12  SFE_LOGO_NAME_FLAME.1_INCH  [SFE_LOGO_NAME_FLAME_.1]  59.82,17.53 90 bottom
LOGO13  OSHW-LOGOS  [OSHW-LOGO-S]  83.31,26.54 0 bottom
LOGO14  SFE_LOGO_FLAME.1_INCH  [SFE_LOGO_FLAME_.1]  83.31,26.54 0 top
LOGO15  SFE_LOGO_NAME_FLAME.1_INCH  [SFE_LOGO_NAME_FLAME_.1]  75.56,17.53 90 bottom
LOGO16  OSHW-LOGOS  [OSHW-LOGO-S]  99.06,26.54 0 bottom
LOGO17  SFE_LOGO_FLAME.1_INCH  [SFE_LOGO_FLAME_.1]  99.06,26.54 0 top
LOGO18  SFE_LOGO_NAME_FLAME.1_INCH  [SFE_LOGO_NAME_FLAME_.1]  91.31,17.53 90 bottom
LOGO19  OSHW-LOGOS  [OSHW-LOGO-S]  114.81,26.54 0 bottom
LOGO20  SFE_LOGO_FLAME.1_INCH  [SFE_LOGO_FLAME_.1]  114.81,26.54 0 top
LOGO21  SFE_LOGO_NAME_FLAME.1_INCH  [SFE_LOGO_NAME_FLAME_.1]  107.06,17.53 90 bottom
LOGO22  OSHW-LOGOS  [OSHW-LOGO-S]  130.56,26.54 0 bottom
LOGO23  SFE_LOGO_FLAME.1_INCH  [SFE_LOGO_FLAME_.1]  130.56,26.54 0 top
LOGO24  SFE_LOGO_NAME_FLAME.1_INCH  [SFE_LOGO_NAME_FLAME_.1]  122.81,17.53 90 bottom
LOGO25  OSHW-LOGOS  [OSHW-LOGO-S]  146.3,26.54 0 bottom
LOGO26  SFE_LOGO_FLAME.1_INCH  [SFE_LOGO_FLAME_.1]  146.3,26.54 0 top
LOGO27  SFE_LOGO_NAME_FLAME.1_INCH  [SFE_LOGO_NAME_FLAME_.1]  138.56,17.53 90 bottom
LOGO28  OSHW-LOGOS  [OSHW-LOGO-S]  162.05,26.54 0 bottom
LOGO29  SFE_LOGO_FLAME.1_INCH  [SFE_LOGO_FLAME_.1]  162.05,26.54 0 top
LOGO30  SFE_LOGO_NAME_FLAME.1_INCH  [SFE_LOGO_NAME_FLAME_.1]  154.31,17.53 90 bottom
LOGO31  OSHW-LOGOS  [OSHW-LOGO-S]  177.8,26.54 0 bottom
LOGO32  SFE_LOGO_FLAME.1_INCH  [SFE_LOGO_FLAME_.1]  177.8,26.54 0 top
LOGO33  SFE_LOGO_NAME_FLAME.1_INCH  [SFE_LOGO_NAME_FLAME_.1]  170.05,17.53 90 bottom
LOGO34  OSHW-LOGOS  [OSHW-LOGO-S]  193.55,26.54 0 bottom
LOGO35  SFE_LOGO_FLAME.1_INCH  [SFE_LOGO_FLAME_.1]  193.55,26.54 0 top
LOGO36  SFE_LOGO_NAME_FLAME.1_INCH  [SFE_LOGO_NAME_FLAME_.1]  185.8,17.53 90 bottom
LOGO37  OSHW-LOGOS  [OSHW-LOGO-S]  209.3,26.54 0 bottom
LOGO38  SFE_LOGO_FLAME.1_INCH  [SFE_LOGO_FLAME_.1]  209.3,26.54 0 top
LOGO39  SFE_LOGO_NAME_FLAME.1_INCH  [SFE_LOGO_NAME_FLAME_.1]  201.55,17.53 90 bottom
LOGO40  OSHW-LOGOS  [OSHW-LOGO-S]  225.04,26.54 0 bottom
LOGO41  SFE_LOGO_FLAME.1_INCH  [SFE_LOGO_FLAME_.1]  225.04,26.54 0 top
LOGO42  SFE_LOGO_NAME_FLAME.1_INCH  [SFE_LOGO_NAME_FLAME_.1]  217.3,17.53 90 bottom
LOGO43  OSHW-LOGOS  [OSHW-LOGO-S]  240.79,26.54 0 bottom
LOGO44  SFE_LOGO_FLAME.1_INCH  [SFE_LOGO_FLAME_.1]  240.79,26.54 0 top
LOGO45  SFE_LOGO_NAME_FLAME.1_INCH  [SFE_LOGO_NAME_FLAME_.1]  233.04,17.53 90 bottom
LOGO46  OSHW-LOGOS  [OSHW-LOGO-S]  20.32,48.64 0 bottom
LOGO47  SFE_LOGO_FLAME.1_INCH  [SFE_LOGO_FLAME_.1]  20.32,48.64 0 top
LOGO48  SFE_LOGO_NAME_FLAME.1_INCH  [SFE_LOGO_NAME_FLAME_.1]  12.57,39.62 90 bottom
LOGO49  OSHW-LOGOS  [OSHW-LOGO-S]  36.07,48.64 0 bottom
LOGO50  SFE_LOGO_FLAME.1_INCH  [SFE_LOGO_FLAME_.1]  36.07,48.64 0 top
LOGO51  SFE_LOGO_NAME_FLAME.1_INCH  [SFE_LOGO_NAME_FLAME_.1]  28.32,39.62 90 bottom
LOGO52  OSHW-LOGOS  [OSHW-LOGO-S]  51.82,48.64 0 bottom
LOGO53  SFE_LOGO_FLAME.1_INCH  [SFE_LOGO_FLAME_.1]  51.82,48.64 0 top
LOGO54  SFE_LOGO_NAME_FLAME.1_INCH  [SFE_LOGO_NAME_FLAME_.1]  44.07,39.62 90 bottom
LOGO55  OSHW-LOGOS  [OSHW-LOGO-S]  67.56,48.64 0 bottom
LOGO56  SFE_LOGO_FLAME.1_INCH  [SFE_LOGO_FLAME_.1]  67.56,48.64 0 top
LOGO57  SFE_LOGO_NAME_FLAME.1_INCH  [SFE_LOGO_NAME_FLAME_.1]  59.82,39.62 90 bottom
LOGO58  OSHW-LOGOS  [OSHW-LOGO-S]  83.31,48.64 0 bottom
LOGO59  SFE_LOGO_FLAME.1_INCH  [SFE_LOGO_FLAME_.1]  83.31,48.64 0 top
LOGO60  SFE_LOGO_NAME_FLAME.1_INCH  [SFE_LOGO_NAME_FLAME_.1]  75.56,39.62 90 bottom
LOGO61  OSHW-LOGOS  [OSHW-LOGO-S]  99.06,48.64 0 bottom
LOGO62  SFE_LOGO_FLAME.1_INCH  [SFE_LOGO_FLAME_.1]  99.06,48.64 0 top
LOGO63  SFE_LOGO_NAME_FLAME.1_INCH  [SFE_LOGO_NAME_FLAME_.1]  91.31,39.62 90 bottom
LOGO64  OSHW-LOGOS  [OSHW-LOGO-S]  114.81,48.64 0 bottom
LOGO65  SFE_LOGO_FLAME.1_INCH  [SFE_LOGO_FLAME_.1]  114.81,48.64 0 top
LOGO66  SFE_LOGO_NAME_FLAME.1_INCH  [SFE_LOGO_NAME_FLAME_.1]  107.06,39.62 90 bottom
LOGO67  OSHW-LOGOS  [OSHW-LOGO-S]  130.56,48.64 0 bottom
LOGO68  SFE_LOGO_FLAME.1_INCH  [SFE_LOGO_FLAME_.1]  130.56,48.64 0 top
LOGO69  SFE_LOGO_NAME_FLAME.1_INCH  [SFE_LOGO_NAME_FLAME_.1]  122.81,39.62 90 bottom
LOGO70  OSHW-LOGOS  [OSHW-LOGO-S]  146.3,48.64 0 bottom
LOGO71  SFE_LOGO_FLAME.1_INCH  [SFE_LOGO_FLAME_.1]  146.3,48.64 0 top
LOGO72  SFE_LOGO_NAME_FLAME.1_INCH  [SFE_LOGO_NAME_FLAME_.1]  138.56,39.62 90 bottom
LOGO73  OSHW-LOGOS  [OSHW-LOGO-S]  162.05,48.64 0 bottom
LOGO74  SFE_LOGO_FLAME.1_INCH  [SFE_LOGO_FLAME_.1]  162.05,48.64 0 top
LOGO75  SFE_LOGO_NAME_FLAME.1_INCH  [SFE_LOGO_NAME_FLAME_.1]  154.31,39.62 90 bottom
LOGO76  OSHW-LOGOS  [OSHW-LOGO-S]  177.8,48.64 0 bottom
LOGO77  SFE_LOGO_FLAME.1_INCH  [SFE_LOGO_FLAME_.1]  177.8,48.64 0 top
LOGO78  SFE_LOGO_NAME_FLAME.1_INCH  [SFE_LOGO_NAME_FLAME_.1]  170.05,39.62 90 bottom
LOGO79  OSHW-LOGOS  [OSHW-LOGO-S]  193.55,48.64 0 bottom
LOGO80  SFE_LOGO_FLAME.1_INCH  [SFE_LOGO_FLAME_.1]  193.55,48.64 0 top
LOGO81  SFE_LOGO_NAME_FLAME.1_INCH  [SFE_LOGO_NAME_FLAME_.1]  185.8,39.62 90 bottom
LOGO82  OSHW-LOGOS  [OSHW-LOGO-S]  209.3,48.64 0 bottom
LOGO83  SFE_LOGO_FLAME.1_INCH  [SFE_LOGO_FLAME_.1]  209.3,48.64 0 top
LOGO84  SFE_LOGO_NAME_FLAME.1_INCH  [SFE_LOGO_NAME_FLAME_.1]  201.55,39.62 90 bottom
LOGO85  OSHW-LOGOS  [OSHW-LOGO-S]  225.04,48.64 0 bottom
LOGO86  SFE_LOGO_FLAME.1_INCH  [SFE_LOGO_FLAME_.1]  225.04,48.64 0 top
LOGO87  SFE_LOGO_NAME_FLAME.1_INCH  [SFE_LOGO_NAME_FLAME_.1]  217.3,39.62 90 bottom
LOGO88  OSHW-LOGOS  [OSHW-LOGO-S]  240.79,48.64 0 bottom
LOGO89  SFE_LOGO_FLAME.1_INCH  [SFE_LOGO_FLAME_.1]  240.79,48.64 0 top
LOGO90  SFE_LOGO_NAME_FLAME.1_INCH  [SFE_LOGO_NAME_FLAME_.1]  233.04,39.62 90 bottom
LOGO91  OSHW-LOGOS  [OSHW-LOGO-S]  20.32,70.74 0 bottom
LOGO92  SFE_LOGO_FLAME.1_INCH  [SFE_LOGO_FLAME_.1]  20.32,70.74 0 top
LOGO93  SFE_LOGO_NAME_FLAME.1_INCH  [SFE_LOGO_NAME_FLAME_.1]  12.57,61.72 90 bottom
LOGO94  OSHW-LOGOS  [OSHW-LOGO-S]  36.07,70.74 0 bottom
LOGO95  SFE_LOGO_FLAME.1_INCH  [SFE_LOGO_FLAME_.1]  36.07,70.74 0 top
LOGO96  SFE_LOGO_NAME_FLAME.1_INCH  [SFE_LOGO_NAME_FLAME_.1]  28.32,61.72 90 bottom
LOGO97  OSHW-LOGOS  [OSHW-LOGO-S]  51.82,70.74 0 bottom
LOGO98  SFE_LOGO_FLAME.1_INCH  [SFE_LOGO_FLAME_.1]  51.82,70.74 0 top
LOGO99  SFE_LOGO_NAME_FLAME.1_INCH  [SFE_LOGO_NAME_FLAME_.1]  44.07,61.72 90 bottom
LOGO100  OSHW-LOGOS  [OSHW-LOGO-S]  67.56,70.74 0 bottom
LOGO101  SFE_LOGO_FLAME.1_INCH  [SFE_LOGO_FLAME_.1]  67.56,70.74 0 top
LOGO102  SFE_LOGO_NAME_FLAME.1_INCH  [SFE_LOGO_NAME_FLAME_.1]  59.82,61.72 90 bottom
LOGO103  OSHW-LOGOS  [OSHW-LOGO-S]  83.31,70.74 0 bottom
LOGO104  SFE_LOGO_FLAME.1_INCH  [SFE_LOGO_FLAME_.1]  83.31,70.74 0 top
LOGO105  SFE_LOGO_NAME_FLAME.1_INCH  [SFE_LOGO_NAME_FLAME_.1]  75.56,61.72 90 bottom
LOGO106  OSHW-LOGOS  [OSHW-LOGO-S]  99.06,70.74 0 bottom
LOGO107  SFE_LOGO_FLAME.1_INCH  [SFE_LOGO_FLAME_.1]  99.06,70.74 0 top
LOGO108  SFE_LOGO_NAME_FLAME.1_INCH  [SFE_LOGO_NAME_FLAME_.1]  91.31,61.72 90 bottom
LOGO109  OSHW-LOGOS  [OSHW-LOGO-S]  114.81,70.74 0 bottom
LOGO110  SFE_LOGO_FLAME.1_INCH  [SFE_LOGO_FLAME_.1]  114.81,70.74 0 top
LOGO111  SFE_LOGO_NAME_FLAME.1_INCH  [SFE_LOGO_NAME_FLAME_.1]  107.06,61.72 90 bottom
LOGO112  OSHW-LOGOS  [OSHW-LOGO-S]  130.56,70.74 0 bottom
LOGO113  SFE_LOGO_FLAME.1_INCH  [SFE_LOGO_FLAME_.1]  130.56,70.74 0 top
LOGO114  SFE_LOGO_NAME_FLAME.1_INCH  [SFE_LOGO_NAME_FLAME_.1]  122.81,61.72 90 bottom
LOGO115  OSHW-LOGOS  [OSHW-LOGO-S]  146.3,70.74 0 bottom
LOGO116  SFE_LOGO_FLAME.1_INCH  [SFE_LOGO_FLAME_.1]  146.3,70.74 0 top
LOGO117  SFE_LOGO_NAME_FLAME.1_INCH  [SFE_LOGO_NAME_FLAME_.1]  138.56,61.72 90 bottom
LOGO118  OSHW-LOGOS  [OSHW-LOGO-S]  162.05,70.74 0 bottom
LOGO119  SFE_LOGO_FLAME.1_INCH  [SFE_LOGO_FLAME_.1]  162.05,70.74 0 top
LOGO120  SFE_LOGO_NAME_FLAME.1_INCH  [SFE_LOGO_NAME_FLAME_.1]  154.31,61.72 90 bottom
LOGO121  OSHW-LOGOS  [OSHW-LOGO-S]  177.8,70.74 0 bottom
LOGO122  SFE_LOGO_FLAME.1_INCH  [SFE_LOGO_FLAME_.1]  177.8,70.74 0 top
LOGO123  SFE_LOGO_NAME_FLAME.1_INCH  [SFE_LOGO_NAME_FLAME_.1]  170.05,61.72 90 bottom
LOGO124  OSHW-LOGOS  [OSHW-LOGO-S]  193.55,70.74 0 bottom
LOGO125  SFE_LOGO_FLAME.1_INCH  [SFE_LOGO_FLAME_.1]  193.55,70.74 0 top
LOGO126  SFE_LOGO_NAME_FLAME.1_INCH  [SFE_LOGO_NAME_FLAME_.1]  185.8,61.72 90 bottom
LOGO127  OSHW-LOGOS  [OSHW-LOGO-S]  209.3,70.74 0 bottom
LOGO128  SFE_LOGO_FLAME.1_INCH  [SFE_LOGO_FLAME_.1]  209.3,70.74 0 top
LOGO129  SFE_LOGO_NAME_FLAME.1_INCH  [SFE_LOGO_NAME_FLAME_.1]  201.55,61.72 90 bottom
LOGO130  OSHW-LOGOS  [OSHW-LOGO-S]  225.04,70.74 0 bottom
LOGO131  SFE_LOGO_FLAME.1_INCH  [SFE_LOGO_FLAME_.1]  225.04,70.74 0 top
LOGO132  SFE_LOGO_NAME_FLAME.1_INCH  [SFE_LOGO_NAME_FLAME_.1]  217.3,61.72 90 bottom
LOGO133  OSHW-LOGOS  [OSHW-LOGO-S]  240.79,70.74 0 bottom
LOGO134  SFE_LOGO_FLAME.1_INCH  [SFE_LOGO_FLAME_.1]  240.79,70.74 0 top
LOGO135  SFE_LOGO_NAME_FLAME.1_INCH  [SFE_LOGO_NAME_FLAME_.1]  233.04,61.72 90 bottom
LOGO136  OSHW-LOGOS  [OSHW-LOGO-S]  20.32,92.84 0 bottom
LOGO137  SFE_LOGO_FLAME.1_INCH  [SFE_LOGO_FLAME_.1]  20.32,92.84 0 top
LOGO138  SFE_LOGO_NAME_FLAME.1_INCH  [SFE_LOGO_NAME_FLAME_.1]  12.57,83.82 90 bottom
LOGO139  OSHW-LOGOS  [OSHW-LOGO-S]  36.07,92.84 0 bottom
LOGO140  SFE_LOGO_FLAME.1_INCH  [SFE_LOGO_FLAME_.1]  36.07,92.84 0 top
LOGO141  SFE_LOGO_NAME_FLAME.1_INCH  [SFE_LOGO_NAME_FLAME_.1]  28.32,83.82 90 bottom
LOGO142  OSHW-LOGOS  [OSHW-LOGO-S]  51.82,92.84 0 bottom
LOGO143  SFE_LOGO_FLAME.1_INCH  [SFE_LOGO_FLAME_.1]  51.82,92.84 0 top
LOGO144  SFE_LOGO_NAME_FLAME.1_INCH  [SFE_LOGO_NAME_FLAME_.1]  44.07,83.82 90 bottom
LOGO145  OSHW-LOGOS  [OSHW-LOGO-S]  67.56,92.84 0 bottom
LOGO146  SFE_LOGO_FLAME.1_INCH  [SFE_LOGO_FLAME_.1]  67.56,92.84 0 top
LOGO147  SFE_LOGO_NAME_FLAME.1_INCH  [SFE_LOGO_NAME_FLAME_.1]  59.82,83.82 90 bottom
LOGO148  OSHW-LOGOS  [OSHW-LOGO-S]  83.31,92.84 0 bottom
LOGO149  SFE_LOGO_FLAME.1_INCH  [SFE_LOGO_FLAME_.1]  83.31,92.84 0 top
LOGO150  SFE_LOGO_NAME_FLAME.1_INCH  [SFE_LOGO_NAME_FLAME_.1]  75.56,83.82 90 bottom
LOGO151  OSHW-LOGOS  [OSHW-LOGO-S]  99.06,92.84 0 bottom
LOGO152  SFE_LOGO_FLAME.1_INCH  [SFE_LOGO_FLAME_.1]  99.06,92.84 0 top
LOGO153  SFE_LOGO_NAME_FLAME.1_INCH  [SFE_LOGO_NAME_FLAME_.1]  91.31,83.82 90 bottom
LOGO154  OSHW-LOGOS  [OSHW-LOGO-S]  114.81,92.84 0 bottom
LOGO155  SFE_LOGO_FLAME.1_INCH  [SFE_LOGO_FLAME_.1]  114.81,92.84 0 top
LOGO156  SFE_LOGO_NAME_FLAME.1_INCH  [SFE_LOGO_NAME_FLAME_.1]  107.06,83.82 90 bottom
LOGO157  OSHW-LOGOS  [OSHW-LOGO-S]  130.56,92.84 0 bottom
LOGO158  SFE_LOGO_FLAME.1_INCH  [SFE_LOGO_FLAME_.1]  130.56,92.84 0 top
LOGO159  SFE_LOGO_NAME_FLAME.1_INCH  [SFE_LOGO_NAME_FLAME_.1]  122.81,83.82 90 bottom
LOGO160  OSHW-LOGOS  [OSHW-LOGO-S]  146.3,92.84 0 bottom
LOGO161  SFE_LOGO_FLAME.1_INCH  [SFE_LOGO_FLAME_.1]  146.3,92.84 0 top
LOGO162  SFE_LOGO_NAME_FLAME.1_INCH  [SFE_LOGO_NAME_FLAME_.1]  138.56,83.82 90 bottom
LOGO163  OSHW-LOGOS  [OSHW-LOGO-S]  162.05,92.84 0 bottom
LOGO164  SFE_LOGO_FLAME.1_INCH  [SFE_LOGO_FLAME_.1]  162.05,92.84 0 top
LOGO165  SFE_LOGO_NAME_FLAME.1_INCH  [SFE_LOGO_NAME_FLAME_.1]  154.31,83.82 90 bottom
LOGO166  OSHW-LOGOS  [OSHW-LOGO-S]  177.8,92.84 0 bottom
LOGO167  SFE_LOGO_FLAME.1_INCH  [SFE_LOGO_FLAME_.1]  177.8,92.84 0 top
LOGO168  SFE_LOGO_NAME_FLAME.1_INCH  [SFE_LOGO_NAME_FLAME_.1]  170.05,83.82 90 bottom
LOGO169  OSHW-LOGOS  [OSHW-LOGO-S]  193.55,92.84 0 bottom
LOGO170  SFE_LOGO_FLAME.1_INCH  [SFE_LOGO_FLAME_.1]  193.55,92.84 0 top
LOGO171  SFE_LOGO_NAME_FLAME.1_INCH  [SFE_LOGO_NAME_FLAME_.1]  185.8,83.82 90 bottom
LOGO172  OSHW-LOGOS  [OSHW-LOGO-S]  209.3,92.84 0 bottom
LOGO173  SFE_LOGO_FLAME.1_INCH  [SFE_LOGO_FLAME_.1]  209.3,92.84 0 top
LOGO174  SFE_LOGO_NAME_FLAME.1_INCH  [SFE_LOGO_NAME_FLAME_.1]  201.55,83.82 90 bottom
LOGO175  OSHW-LOGOS  [OSHW-LOGO-S]  225.04,92.84 0 bottom
LOGO176  SFE_LOGO_FLAME.1_INCH  [SFE_LOGO_FLAME_.1]  225.04,92.84 0 top
LOGO177  SFE_LOGO_NAME_FLAME.1_INCH  [SFE_LOGO_NAME_FLAME_.1]  217.3,83.82 90 bottom
LOGO178  OSHW-LOGOS  [OSHW-LOGO-S]  240.79,92.84 0 bottom
LOGO179  SFE_LOGO_FLAME.1_INCH  [SFE_LOGO_FLAME_.1]  240.79,92.84 0 top
LOGO180  SFE_LOGO_NAME_FLAME.1_INCH  [SFE_LOGO_NAME_FLAME_.1]  233.04,83.82 90 bottom
LOGO181  OSHW-LOGOS  [OSHW-LOGO-S]  20.32,114.94 0 bottom
LOGO182  SFE_LOGO_FLAME.1_INCH  [SFE_LOGO_FLAME_.1]  20.32,114.94 0 top
LOGO183  SFE_LOGO_NAME_FLAME.1_INCH  [SFE_LOGO_NAME_FLAME_.1]  12.57,105.92 90 bottom
LOGO184  OSHW-LOGOS  [OSHW-LOGO-S]  36.07,114.94 0 bottom
LOGO185  SFE_LOGO_FLAME.1_INCH  [SFE_LOGO_FLAME_.1]  36.07,114.94 0 top
LOGO186  SFE_LOGO_NAME_FLAME.1_INCH  [SFE_LOGO_NAME_FLAME_.1]  28.32,105.92 90 bottom
LOGO187  OSHW-LOGOS  [OSHW-LOGO-S]  51.82,114.94 0 bottom
LOGO188  SFE_LOGO_FLAME.1_INCH  [SFE_LOGO_FLAME_.1]  51.82,114.94 0 top
LOGO189  SFE_LOGO_NAME_FLAME.1_INCH  [SFE_LOGO_NAME_FLAME_.1]  44.07,105.92 90 bottom
LOGO190  OSHW-LOGOS  [OSHW-LOGO-S]  67.56,114.94 0 bottom
LOGO191  SFE_LOGO_FLAME.1_INCH  [SFE_LOGO_FLAME_.1]  67.56,114.94 0 top
LOGO192  SFE_LOGO_NAME_FLAME.1_INCH  [SFE_LOGO_NAME_FLAME_.1]  59.82,105.92 90 bottom
LOGO193  OSHW-LOGOS  [OSHW-LOGO-S]  83.31,114.94 0 bottom
LOGO194  SFE_LOGO_FLAME.1_INCH  [SFE_LOGO_FLAME_.1]  83.31,114.94 0 top
LOGO195  SFE_LOGO_NAME_FLAME.1_INCH  [SFE_LOGO_NAME_FLAME_.1]  75.56,105.92 90 bottom
LOGO196  OSHW-LOGOS  [OSHW-LOGO-S]  99.06,114.94 0 bottom
LOGO197  SFE_LOGO_FLAME.1_INCH  [SFE_LOGO_FLAME_.1]  99.06,114.94 0 top
LOGO198  SFE_LOGO_NAME_FLAME.1_INCH  [SFE_LOGO_NAME_FLAME_.1]  91.31,105.92 90 bottom
LOGO199  OSHW-LOGOS  [OSHW-LOGO-S]  114.81,114.94 0 bottom
LOGO200  SFE_LOGO_FLAME.1_INCH  [SFE_LOGO_FLAME_.1]  114.81,114.94 0 top
LOGO201  SFE_LOGO_NAME_FLAME.1_INCH  [SFE_LOGO_NAME_FLAME_.1]  107.06,105.92 90 bottom
LOGO202  OSHW-LOGOS  [OSHW-LOGO-S]  130.56,114.94 0 bottom
LOGO203  SFE_LOGO_FLAME.1_INCH  [SFE_LOGO_FLAME_.1]  130.56,114.94 0 top
LOGO204  SFE_LOGO_NAME_FLAME.1_INCH  [SFE_LOGO_NAME_FLAME_.1]  122.81,105.92 90 bottom
LOGO205  OSHW-LOGOS  [OSHW-LOGO-S]  146.3,114.94 0 bottom
LOGO206  SFE_LOGO_FLAME.1_INCH  [SFE_LOGO_FLAME_.1]  146.3,114.94 0 top
LOGO207  SFE_LOGO_NAME_FLAME.1_INCH  [SFE_LOGO_NAME_FLAME_.1]  138.56,105.92 90 bottom
LOGO208  OSHW-LOGOS  [OSHW-LOGO-S]  162.05,114.94 0 bottom
LOGO209  SFE_LOGO_FLAME.1_INCH  [SFE_LOGO_FLAME_.1]  162.05,114.94 0 top
LOGO210  SFE_LOGO_NAME_FLAME.1_INCH  [SFE_LOGO_NAME_FLAME_.1]  154.31,105.92 90 bottom
LOGO211  OSHW-LOGOS  [OSHW-LOGO-S]  177.8,114.94 0 bottom
LOGO212  SFE_LOGO_FLAME.1_INCH  [SFE_LOGO_FLAME_.1]  177.8,114.94 0 top
LOGO213  SFE_LOGO_NAME_FLAME.1_INCH  [SFE_LOGO_NAME_FLAME_.1]  170.05,105.92 90 bottom
LOGO214  OSHW-LOGOS  [OSHW-LOGO-S]  193.55,114.94 0 bottom
LOGO215  SFE_LOGO_FLAME.1_INCH  [SFE_LOGO_FLAME_.1]  193.55,114.94 0 top
LOGO216  SFE_LOGO_NAME_FLAME.1_INCH  [SFE_LOGO_NAME_FLAME_.1]  185.8,105.92 90 bottom
LOGO217  OSHW-LOGOS  [OSHW-LOGO-S]  209.3,114.94 0 bottom
LOGO218  SFE_LOGO_FLAME.1_INCH  [SFE_LOGO_FLAME_.1]  209.3,114.94 0 top
LOGO219  SFE_LOGO_NAME_FLAME.1_INCH  [SFE_LOGO_NAME_FLAME_.1]  201.55,105.92 90 bottom
LOGO220  OSHW-LOGOS  [OSHW-LOGO-S]  225.04,114.94 0 bottom
LOGO221  SFE_LOGO_FLAME.1_INCH  [SFE_LOGO_FLAME_.1]  225.04,114.94 0 top
LOGO222  SFE_LOGO_NAME_FLAME.1_INCH  [SFE_LOGO_NAME_FLAME_.1]  217.3,105.92 90 bottom
LOGO223  OSHW-LOGOS  [OSHW-LOGO-S]  240.79,114.94 0 bottom
LOGO224  SFE_LOGO_FLAME.1_INCH  [SFE_LOGO_FLAME_.1]  240.79,114.94 0 top
LOGO225  SFE_LOGO_NAME_FLAME.1_INCH  [SFE_LOGO_NAME_FLAME_.1]  233.04,105.92 90 bottom
R1  5.1k  [0603]  17.02,9.4 0 top
R2  5.1k  [0603]  32.77,9.4 0 top
R3  5.1k  [0603]  32.77,25.91 180 top
R4  5.1k  [0603]  17.02,25.91 180 top
R5  5.1k  [0603]  48.51,9.4 0 top
R6  5.1k  [0603]  48.51,25.91 180 top
R7  5.1k  [0603]  64.26,9.4 0 top
R8  5.1k  [0603]  64.26,25.91 180 top
R9  5.1k  [0603]  80.01,9.4 0 top
R10  5.1k  [0603]  80.01,25.91 180 top
R11  5.1k  [0603]  95.76,9.4 0 top
R12  5.1k  [0603]  95.76,25.91 180 top
R13  5.1k  [0603]  111.51,9.4 0 top
R14  5.1k  [0603]  111.51,25.91 180 top
R15  5.1k  [0603]  127.25,9.4 0 top
R16  5.1k  [0603]  127.25,25.91 180 top
R17  5.1k  [0603]  143,9.4 0 top
R18  5.1k  [0603]  143,25.91 180 top
R19  5.1k  [0603]  158.75,9.4 0 top
R20  5.1k  [0603]  158.75,25.91 180 top
R21  5.1k  [0603]  174.5,9.4 0 top
R22  5.1k  [0603]  174.5,25.91 180 top
R23  5.1k  [0603]  190.25,9.4 0 top
R24  5.1k  [0603]  190.25,25.91 180 top
R25  5.1k  [0603]  205.99,9.4 0 top
R26  5.1k  [0603]  205.99,25.91 180 top
R27  5.1k  [0603]  221.74,9.4 0 top
R28  5.1k  [0603]  221.74,25.91 180 top
R29  5.1k  [0603]  237.49,9.4 0 top
R30  5.1k  [0603]  237.49,25.91 180 top
R31  5.1k  [0603]  17.02,31.5 0 top
R32  5.1k  [0603]  17.02,48.01 180 top
R33  5.1k  [0603]  32.77,31.5 0 top
R34  5.1k  [0603]  32.77,48.01 180 top
R35  5.1k  [0603]  48.51,31.5 0 top
R36  5.1k  [0603]  48.51,48.01 180 top
R37  5.1k  [0603]  64.26,31.5 0 top
R38  5.1k  [0603]  64.26,48.01 180 top
R39  5.1k  [0603]  80.01,31.5 0 top
R40  5.1k  [0603]  80.01,48.01 180 top
R41  5.1k  [0603]  95.76,31.5 0 top
R42  5.1k  [0603]  95.76,48.01 180 top
R43  5.1k  [0603]  111.51,31.5 0 top
R44  5.1k  [0603]  111.51,48.01 180 top
R45  5.1k  [0603]  127.25,31.5 0 top
R46  5.1k  [0603]  127.25,48.01 180 top
R47  5.1k  [0603]  143,31.5 0 top